# Altium PCB carteAction2026.PcbDoc
Units mil, origin at the board's own origin, x right, y up, seen from the top; angles counter-clockwise.
Board outline 6000 x 4000 mil, 2 copper layers (Top Layer, Bottom Layer); 54 components, 46 nets, 191 pads, 0 vias.
Unrouted connection lines stored in the file: 128.
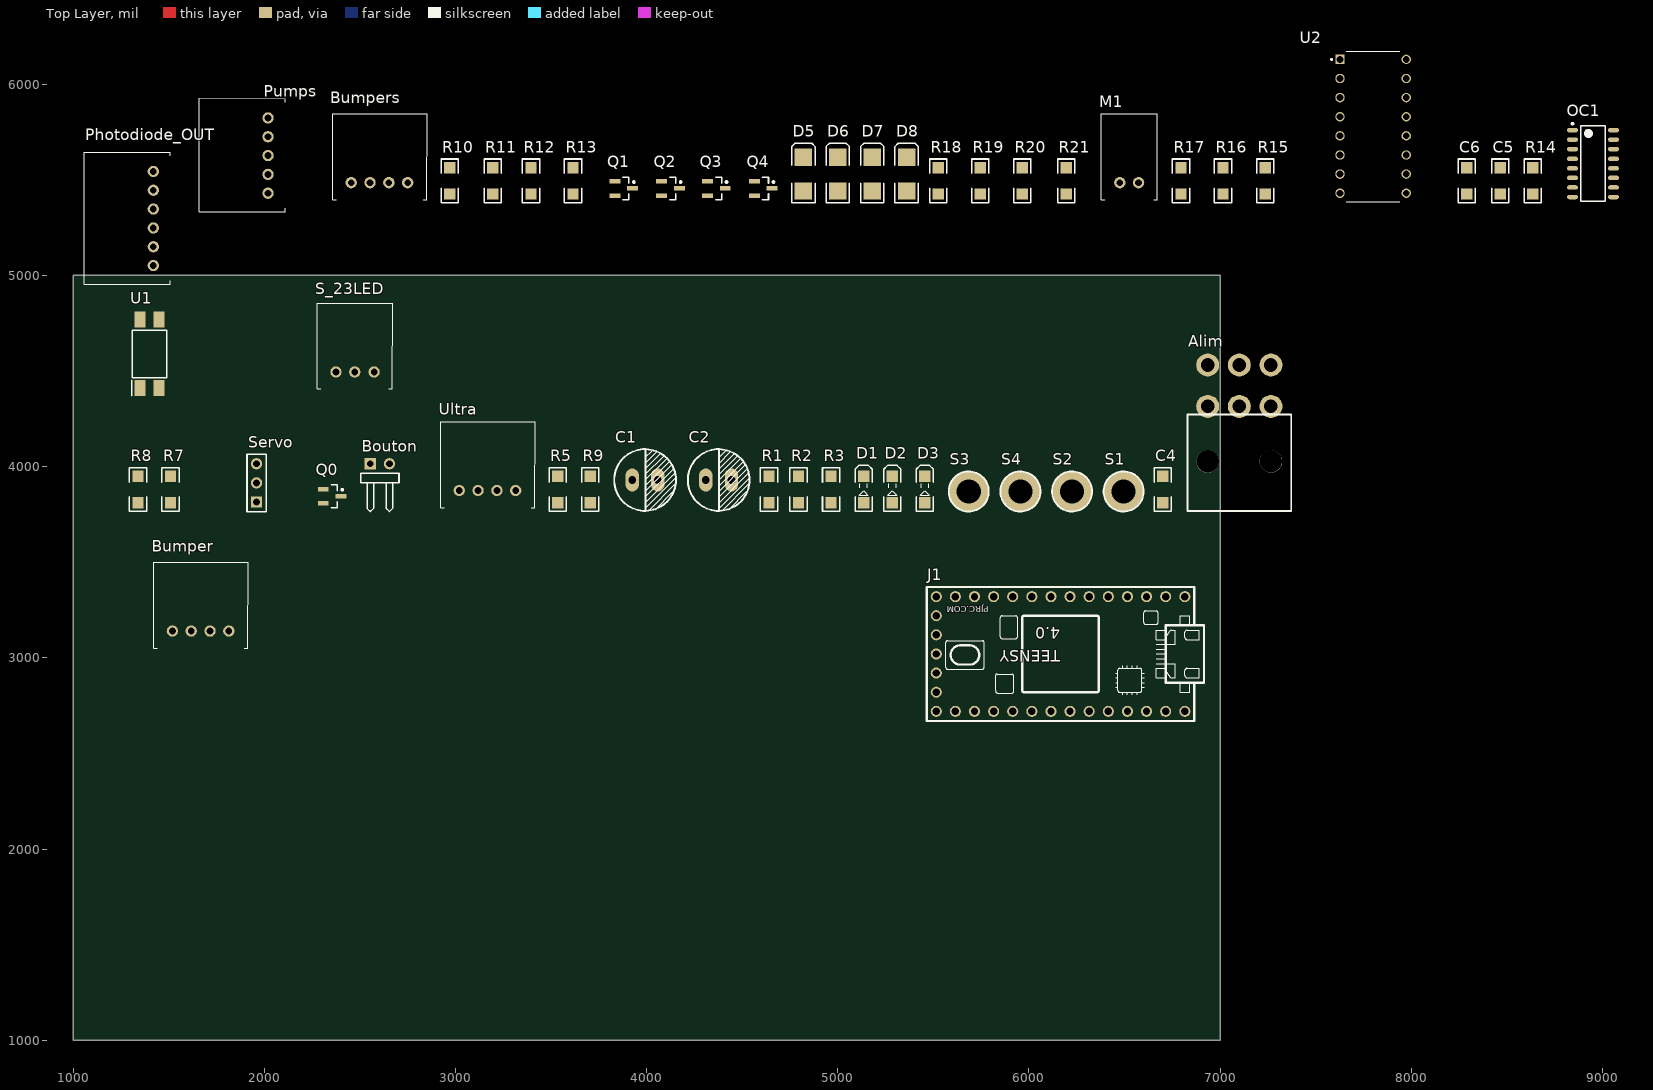
[diagram p0: Top Layer view]
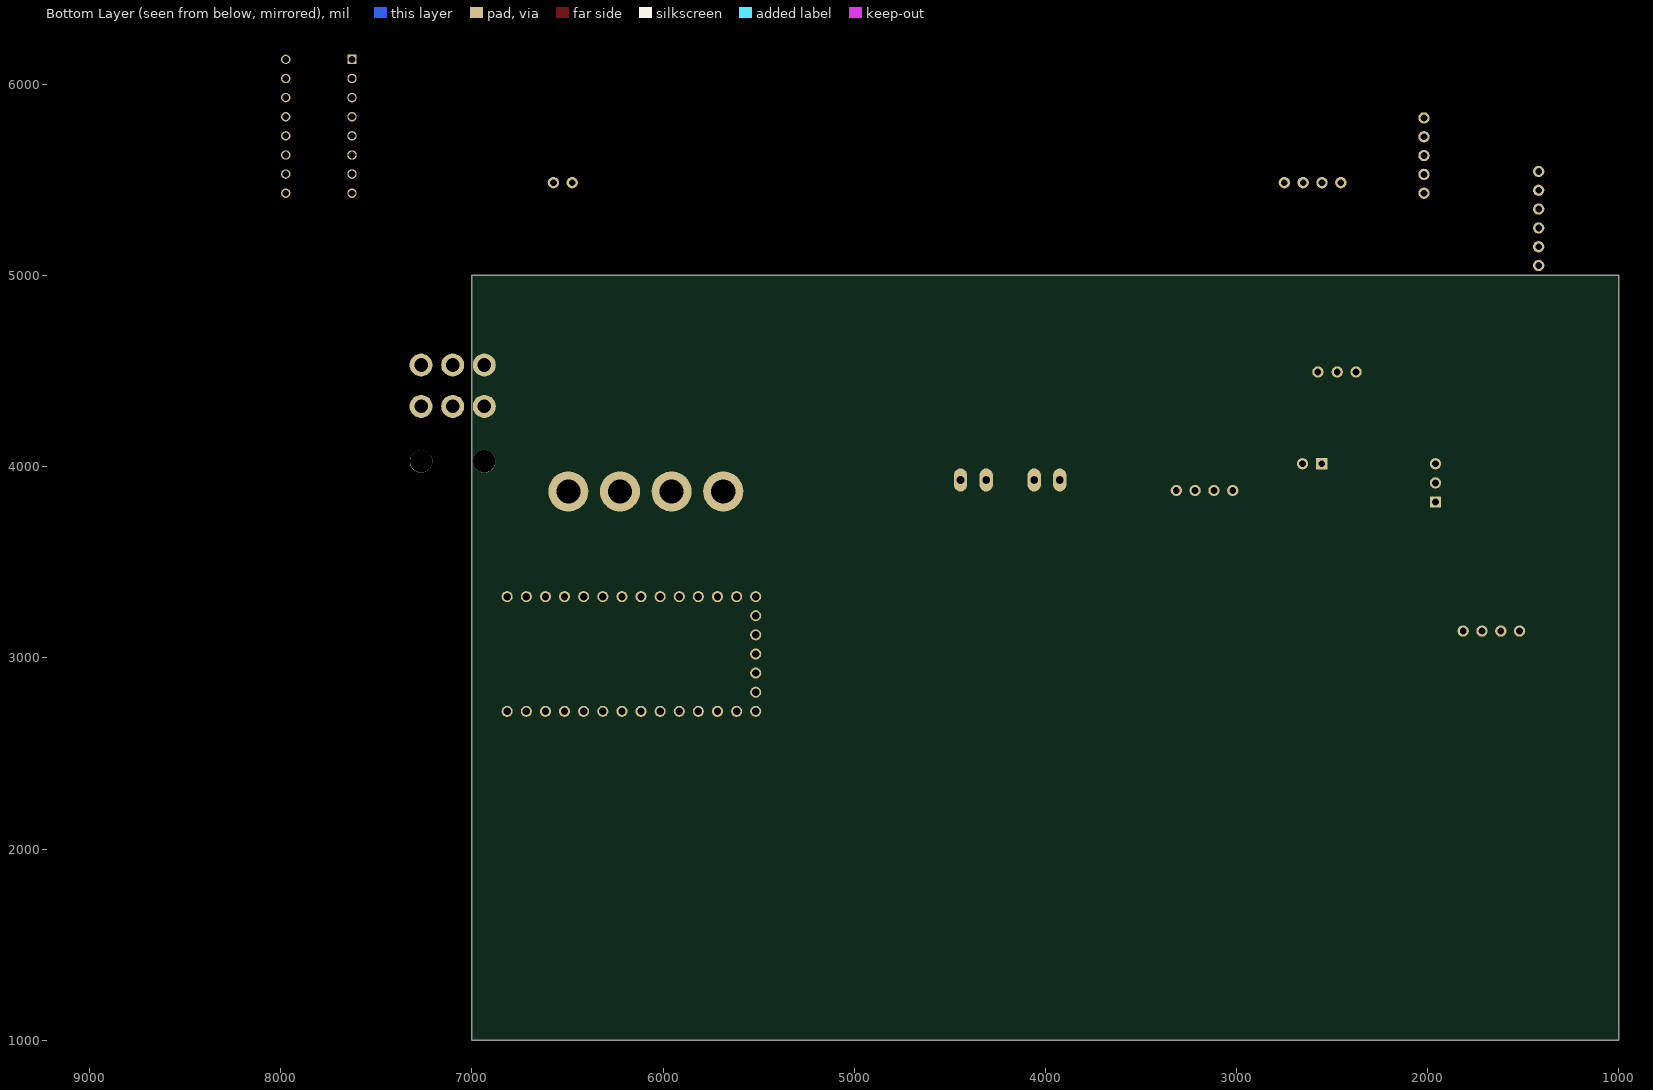
[diagram p1: Bottom Layer view, seen from below]

## Layer stack, top to bottom
Top Solder: solder mask 0.4, Solder Resist, Dk 3.5
Top Layer: signal copper 1.4
Dielectric 1: dielectric 12.6, FR-4, Dk 4.8
Bottom Layer: signal copper 1.4
Bottom Solder: solder mask 0.4, Solder Resist, Dk 3.5

## Board outline
1000,1000 7000,1000 7000,5000 1000,5000

## Design rules (kind name [scope] priority, off if disabled: settings)
Clearance [All] p1: gap=10 ignorepadtopadclearanceinfootprint=FALSE
PolygonConnect [All] p1: connectstyle=Relief reliefconductorwidth=10 reliefentries=4 polygonreliefangle="90 Angle" airgapwidth=10
RoutingVias [All] p1: holewidth=28 width=50 viastyle="Through Hole" minholewidth=28 minwidth=50 maxholewidth=28 maxwidth=50
SolderMaskExpansion [All] p1: expansion=4 istentingtop=FALSE
SupplyNets "Schematic Supply Nets_5" [InNet('5V_A')] p1: voltage=0.000
SupplyNets "Schematic Supply Nets_4" [InNet('GND_A')] p2: voltage=0.000
SupplyNets "Schematic Supply Nets_3" [InNet('12V_A')] p3: voltage=0.000
SupplyNets "Schematic Supply Nets_2" [InNet('5V_L')] p4: voltage=0.000
SupplyNets "Schematic Supply Nets_1" [InNet('GND_L')] p5: voltage=0.000
SupplyNets "Schematic Supply Nets" [InNet('3V_L')] p6: voltage=0.000
Width [All] p1: maxlimit=10 minlimit=10 preferedwidth=10
30 further rules are at their usual default settings.

## Classes and differential pairs
component class CarteAction_PontLevis2026: Bumper Bumpers C5 C6 D5 D6 D7 D8 M1 OC1 Photodiode_OUT Pumps Q1 Q2 Q3 Q4 R10 R11 R12 R13 R14 R15 R16 R17 R18 R19 R20 R21 S_23LED U2
component class CarteAction2026: Alim Bouton C1 C2 C4 D1 D2 D3 J1 Q0 R1 R2 R3 R5 R7 R8 R9 S1 S2 S3 S4 Servo U1 Ultra

## Components (designator, comment, footprint, x,y, rotation, side; value= is the part's Value field where it differs from the comment)
Alim "Header 3X2H" MOLEX_MINIFITJR_3X2 7100,4315 r0 top
Bouton "Header 2H" HDR1X2H 2555,4015 r0 top
Bumper "Header 4H" S4B-XH-A 1519.72,3140 r0 top
Bumpers "Header 4H" S4B-XH-A 2455,5485 r0 top
C1 "Cap2" Condensateur 3925,3930 r0 top value=100µF
C2 "Cap2" Condensateur 4310,3930 r0 top value=100µF
C4 "(Optional)" "Capacitor 1206" 6700,3880 r90 top value=10uF
C5 "" "Capacitor 1206" 8465,5495 r90 top value="100 nF"
C6 "" "Capacitor 1206" 8290,5495 r90 top value="1 uF"
D1 "5V_L" KP-3216SEC 5135,3880 r90 top
D2 "5V_A" KP-3216SEC 5285,3880 r90 top
D3 "12V_A" KP-3216SEC 5455,3880 r90 top
D5 "LGE SS12" SMB 4820,5530 r90 top
D6 "LGE SS12" SMB 5000,5530 r90 top
D7 "LGE SS12" SMB 5180,5530 r90 top
D8 "LGE SS12" SMB 5360,5530 r90 top
J1 "TEENSY_4.0" TEENSY_4.0 6165,3020 r180 top
M1 "M1" S2B-XH-A 6475,5485 r0 top
OC1 "PhotoCoupler" "16 pins SOIC, TI" 8950,5585 r0 top
Photodiode_OUT "Header 6H" S6B-XH-A 1420,5051.57 r90 top
Pumps "Header 5H" S5B-XH-A 2020,5430 r90 top
Q0 "MOSFET-N" SOT23_M 2355,3845 r0 top
Q1 "MOSFET-N" SOT23_M 3880,5455 r0 top
Q2 "MOSFET-N" SOT23_M 4125,5455 r0 top
Q3 "MOSFET-N" SOT23_M 4365,5455 r0 top
Q4 "MOSFET-N" SOT23_M 4610,5455 r0 top
R1 "Res2" "Resistor 1206" 4640,3880 r90 top value=300
R2 "Res2" "Resistor 1206" 4795,3880 r90 top value=300
R3 "Res2" "Resistor 1206" 4965,3880 r90 top value=1K3
R5 "Res2" "Resistor 1206" 3535,3880 r90 top value=10K
R7 "210" "Resistor 1206" 1510,3880 r90 top
R8 "Res2" "Resistor 1206" 1340,3880 r90 top value=10K
R9 "Res2" "Resistor 1206" 3705,3880 r90 top value=10K
R10 "Res2" "Resistor 1206" 2970,5495 r90 top value=10K
R11 "Res2" "Resistor 1206" 3195,5495 r90 top value=10K
R12 "Res2" "Resistor 1206" 3395,5495 r90 top value=10K
R13 "Res2" "Resistor 1206" 3615,5495 r90 top value=10K
R14 "Res2" "Resistor 1206" 8635,5495 r90 top value=210
R15 "Res2" "Resistor 1206" 7235,5495 r90 top value=210
R16 "Res2" "Resistor 1206" 7015,5495 r90 top value=210
R17 "Res2" "Resistor 1206" 6795,5495 r90 top value=210
R18 "Res2" "Resistor 1206" 5525,5495 r90 top value=10K
R19 "Res2" "Resistor 1206" 5745,5495 r90 top value=10K
R20 "Res2" "Resistor 1206" 5965,5495 r90 top value=10K
R21 "Res2" "Resistor 1206" 6195,5495 r90 top value=10K
S1 "Screw M3" "Screw M3" 6495,3870 r0 top
S2 "Screw M3" "Screw M3" 6225,3870 r0 top
S3 "Screw M3" "Screw M3" 5685,3870 r0 top
S4 "Screw M3" "Screw M3" 5955,3870 r0 top
S_23LED "Header 3" S3B-XH-A 2375,4495 r0 top
Servo "Header 3" HDR1X3 1960,3815 r90 top
U1 "FOD817S" SOP254P1016X385-4N 1400,4590 r90 top
U2 "L293D" DIP880W50P254L2000H510Q16 7800,5780 r0 top
Ultra "Header 4H" S4B-XH-A 3020,3875 r0 top

## Footprints (in the part's own frame and the unit in brackets; to place one, negate y for a bottom-side part, rotate by r counter-clockwise, add the part's x,y. Pads: shape width x height; smd on the part's side, far side on the other; paste and mask are expansions set on the pad)
"16 pins SOIC, TI" [mm] "SOIC, 16-Leads, Body 9,90x3,90mm, Pitch 1,27mm, IPC Medium Density"
  oval 1.45x0.6 smd: 1(-2.725,4.445) 2(-2.725,3.175) 3(-2.725,1.905) 4(-2.725,0.635) 5(-2.725,-0.635) 6(-2.725,-1.905) 7(-2.725,-3.175) 8(-2.725,-4.445) 9(2.725,-4.445) 10(2.725,-3.175) 11(2.725,-1.905) 12(2.725,-0.635) 13(2.725,0.635) 14(2.725,1.905) 15(2.725,3.175) 16(2.725,4.445)
  silkscreen extent -2.85,-5 1.6,5.42, body extent -3,-5 3,5, height 1.75
"Capacitor 1206" [mm]
  rect 1.5x1.5 smd: 1(-1.75,0) 2(1.75,0)
  silkscreen extent -2.89,-1.14 2.89,1.14, body extent -1.98,-0.99 1.98,0.96, height 1.3
Condensateur [mil]
  oval 70x120 hole 40: 1(0,0) 2(133.86,0)
  silkscreen extent -94,-161 228,161, body extent -93,-160 227,160, height 500
DIP880W50P254L2000H510Q16 [mm]
  rect 1.25x1.25 / inner round 1.25 / far side rect 1.25x1.25 hole 0.9: 1(-4.4,8.89)
  round 1.25 hole 0.9: 2(-4.4,6.35) 3(-4.4,3.81) 4(-4.4,1.27) 5(-4.4,-1.27) 6(-4.4,-3.81) 7(-4.4,-6.35) 8(-4.4,-8.89) 9(4.4,-8.89) 10(4.4,-6.35) 11(4.4,-3.81) 12(4.4,-1.27) 13(4.4,1.27) 14(4.4,3.81) 15(4.4,6.35) 16(4.4,8.89)
  silkscreen extent -5.62,-10 3.55,10, body extent -10,-4.62 10,4.62, height 5.1
HDR1X2H [mm] "Connector; Header; 2 Position; Right Angle"
  rect 1.5x1.5 hole 0.9: 1(0,0)
  round 1.5 hole 0.9: 2(2.54,0)
  silkscreen extent -1.27,-6.35 3.81,-1.27
HDR1X3 [mm] "Connector; Header; 3 Position"
  rect 1.5x1.5 hole 0.9: 1(0,0)
  round 1.5 hole 0.9: 2(2.54,0) 3(5.08,0)
  silkscreen extent -1.27,-1.27 6.35,1.27
KP-3216SEC [mm]
  rect 1.5x1.5 smd: 1(-1.75,0) 2(1.75,0)
  silkscreen extent -2.89,-1.14 3.2,1.14, body extent -1.7,-0.79 1.5,0.81, height 1.1
MOLEX_MINIFITJR_3X2 [mm] "MOLEX_MINIFITJR_3X2, 39-30-1060"
  round 3.048 hole 1.8: 1(-4.2,5.5) 2(-4.2,0) 3(0,5.5) 4(0,0) 5(4.2,5.5) 6(4.2,0)
  round 3 hole 3 unplated: 10(-4.2,-7.3) 11(4.2,-7.3)
  silkscreen extent -6.9,-13.9 6.9,-1.1, body extent -6.9,-13.9 7.3,6.04, height 11.41
"Resistor 1206" [mm]
  rect 1.5x1.5 smd: 1(-1.75,0) 2(1.75,0)
  silkscreen extent -2.89,-1.14 2.89,1.14, body extent -1.98,-0.95 1.98,0.93, height 0.55
S2B-XH-A [mm]
  round 1.5 hole 0.9: 1(0,0) 2(2.5,0)
  silkscreen extent -2.45,-2.26 5,9.14, body extent -2.41,-2.32 4.99,9.18, height 6.15
S3B-XH-A [mm]
  round 1.5 hole 0.9: 1(0,0) 2(2.5,0) 3(5.08,0)
  silkscreen extent -2.45,-2.26 7.54,9.14, body extent -2.44,-2.27 7.46,9.23, height 6.15
S4B-XH-A [mm]
  round 1.5 hole 0.9: 1(0,0) 2(2.5,0) 3(5,0) 4(7.5,0)
  silkscreen extent -2.45,-2.26 10.08,9.14, body extent -2.44,-2.32 9.96,9.18, height 6.15
S5B-XH-A [mm]
  round 1.5 hole 0.9: 1(0,0) 2(2.5,0) 3(5,0) 4(7.5,0) 5(10,0)
  silkscreen extent -2.45,-2.26 12.58,9.14, body extent -2.45,-2.3 12.45,9.2, height 6.15
S6B-XH-A [mm]
  round 1.5 hole 0.9: 1(0,0) 2(2.5,0) 3(5,0) 4(7.5,0) 5(10,0) 6(12.5,0)
  silkscreen extent -2.45,-2.26 15.08,9.14, body extent -2.45,-2.3 14.95,9.2, height 6.15
"Screw M3" [mm] "M3 iso Screw"
  round 5.32 hole 3.2 unplated: 0(0,0)
  silkscreen extent -2.66,-2.66 2.66,2.66
SMB [mm] "DO-214-AA/SMB; 2 C-Bend Leads; Body 5.3 x 3.6 mm, inc. leads (LxW)"
  rect 2.3x2.3 smd: 1(-2.25,0) 2(2.25,0)
  silkscreen extent -3.8,-1.55 4.1,1.55
SOP254P1016X385-4N [mm]
  rect 2.1x1.5 smd: 1(-4.55,1.27) 2(-4.55,-1.27) 3(4.55,-1.27) 4(4.55,1.27)
  silkscreen extent -5.6,-2.3 3.15,2.37, body extent -5.08,-2.3 5.08,2.3, height 3.85
SOT23_M [mm] "SOT23, 3-Leads, Body 2.9x1.3mm, Pitch 0.95mm, Lead Span 2.3mm - Reverse Pinning, IPC Low Density"
  rect 1.45x0.6 smd: 1(1.175,0) 2(-1.175,-0.95) 3(-1.175,0.95)
  silkscreen extent -0.1,-1.5 1.48,1.5, body extent -0.7,-1.5 0.7,1.5, height 1.1
TEENSY_4.0 [mil]
  round 58 hole 38: 0/RX(-550,-300) 1/TX(-450,-300) 2(-350,-300) 3/CANTX(-250,-300) 3V3_LN(650,-100) 3V3_LO(-450,300) 4/CANRX(-150,-300) 5(-50,-300) 6(50,-300) 7(150,-300) 8(250,-300) 9/CS(350,-300) 10/CS(450,-300) 11/MOSI(550,-300) 12/MISO(650,-300) 13/SCK(650,300) 14/A0(550,300) 15/A1(450,300) 16/A2(350,300) 17/A3(250,300) 18/A4/SDA(150,300) 19/A5/SCL(50,300) 20/A6(-50,300) 21/A7(-150,300) 22/A8(-250,300) 23/A9(-350,300) GND(-650,-300) GND2(-550,300) GND3(650,0) ON/OFF(650,200) PROG(650,100) VBAT\(650,-200) VIN(-650,300)
  silkscreen extent -750,-350 700,350, body extent -728,-350 700,350, height 172

## Part data
Alim: "Header, 3-Pin, Dual row, Right Angle", LatestRevisionDate=17-Jul-2002, LatestRevisionNote="Re-released for DXP Platform.", Publisher="Altium Limited"
Bouton: "Header, 2-Pin, Right Angle", LatestRevisionDate=17-Jul-2002, LatestRevisionNote="Re-released for DXP Platform.", Publisher="Altium Limited"
Bumper Bumpers Ultra: "Header, 4-Pin, Right Angle", LatestRevisionDate=17-Jul-2002, LatestRevisionNote="Re-released for DXP Platform.", Publisher="Altium Limited"
C1 C2: "Capacitor", PackageDescription="Capacitor; 2 Leads", PackageReference=CAPR5-4X5, Published=23-Sep-2002, Publisher="Altium Limited"
C4 C5 C6: library part Cap, "Capacitor", LatestRevisionDate=17-Jul-2002, LatestRevisionNote="Re-released for DXP Platform.", PackageDescription="Radial Cap, Thru-Hole; 2 Leads; 0.3 in Pin Spacing", PackageReference=RAD-0.3, Published=8-Jun-2000, Publisher="Altium Limited"
D1 D2 D3: library part LED2, "Typical RED, GREEN, YELLOW, AMBER GaAs LED", LatestRevisionDate=17-Jul-2002, LatestRevisionNote="Re-released for DXP Platform.", PackageDescription="SM LED; 2 Flat Leads", PackageReference=3.2X1.6X1.1, PackageVersion=Feb-2002, Published=8-Jun-2000, Publisher="Altium Limited"
D5 D6 D7 D8: library part Diode, "Default Diode", Code_JEDEC=DO-214-AB, LatestRevisionDate=17-Jul-2002, LatestRevisionNote="Re-released for DXP Platform.", PackageDescription="DO-214-AB/SMC; 2 C-Bend Leads; Body 7.9 x 5.9 mm, inc. leads (LxW)", PackageReference=SMC, PackageVersion=Sep-1996, Published=8-Jun-2000, Publisher="Altium Limited"
J1: Package=None, Check_prices=https://www.snapeda.com/parts/Teensy%204.0/PJRC/view-part/?ref=eda, MF=PJRC, MP="Teensy 4.0", SnapEDA_Link=https://www.snapeda.com/parts/Teensy%204.0/PJRC/view-part/?ref=snap
M1: library part "Header 2H", "Header, 2-Pin, Right Angle", LatestRevisionDate=17-Jul-2002, LatestRevisionNote="Re-released for DXP Platform.", Publisher="Altium Limited"
OC1: library part LTV-247, "Integrated Circuit", Manufacturer_Name=Lite-On, Mouser Part Number=859-LTV-247, Arrow Part Number=LTV-247, Arrow Price/Stock=https://www.arrow.com/en/products/ltv-247/lite-on-technology, Datasheet Link=http://optoelectronics.liteon.com/upload/download/DS70-2009-0014/LTV-2X7%20sereis%20Mar17.PDF, Manufacturer_Part_Number=LTV-247, Mouser Price/Stock=https://www.mouser.co.uk/ProductDetail/Lite-On/LTV-247/?qs=9ayhpukWNmvWpoxQBzWkFA%3D%3D
Photodiode_OUT: "Header, 6-Pin, Right Angle", LatestRevisionDate=17-Jul-2002, LatestRevisionNote="Re-released for DXP Platform.", Publisher="Altium Limited"
Pumps: "Header, 5-Pin, Right Angle", LatestRevisionDate=17-Jul-2002, LatestRevisionNote="Re-released for DXP Platform.", Publisher="Altium Limited"
Q0 Q1 Q2 Q3 Q4: "N-Channel MOSFET", LatestRevisionDate=17-Jul-2002, LatestRevisionNote="Re-released for DXP Platform.", PackageDescription="TO, Flat Index; 3 In-Line, Axial Leads; Body Dia. 4.6mm; Lead Dia. 0.5 mm (max)", PackageReference=E3, PackageVersion=1995/1996, Published=8-Jun-2000, Publisher="Altium Limited"
R1 R2 R3 R5 R8 R9 R10 R11 R12 R13 R14 R15 R16 R17 R18 R19 R20 R21: "Resistor", LatestRevisionDate=17-Jul-2002, LatestRevisionNote="Re-released for DXP Platform.", PackageDescription="Axial Device, Thru-Hole; 2 Leads; 0.4 in Pin Spacing", PackageReference=AXIAL-0.4, Published=8-Jun-2000, Publisher="Altium Limited"
R7: library part Res2, "Resistor", LatestRevisionDate=17-Jul-2002, LatestRevisionNote="Re-released for DXP Platform.", PackageDescription="Axial Device, Thru-Hole; 2 Leads; 0.4 in Pin Spacing", PackageReference=AXIAL-0.4, Published=8-Jun-2000, Publisher="Altium Limited"
S_23LED Servo: "Header, 3-Pin", LatestRevisionDate=17-Jul-2002, LatestRevisionNote="Re-released for DXP Platform.", Publisher="Altium Limited"
U1: library part Optoisolator1, "4-Pin Phototransistor Optocoupler", DatasheetVersion=Nov-2003, LatestRevisionDate=04-Mar-2005, LatestRevisionNote="Sch pins 3 & 4 Swapped.", PackageReference=DIP-4, Published=24-Mar-1999, Publisher="Altium Limited"
U2: "Bipolar Motor Driver - Parallel 16-PowerDIP", Package="DIP-16 STMicroelectronics", Availability="In Stock", Check_prices=https://www.snapeda.com/parts/L293D/STMicroelectronics/view-part/?ref=eda, MF=STMicroelectronics, MP=L293D, Price=None, Purchase-URL=https://pricing.snapeda.com/search/part/L293D/?ref=eda, SnapEDA_Link=https://www.snapeda.com/parts/L293D/STMicroelectronics/view-part/?ref=snap

## Nets (pads, with @x,y where several pads share a name; then routed paths per layer and width w, separated by ;. In a path a pad name is that pad's centre, name@x,y a point inside that pad or via, vN(x,y) a via of type N, cw(c..) or ccw(c..) an arc to the next point about the centre after c; other vN are vias at no path point)
3V_L: Bouton.2 Bumper.1 Bumpers.1 J1.3V3_LO Q0.3
5V_A: Alim.6 C1.1 C5.1 D2.1 Photodiode_OUT.1 R5.1 Servo.1 U1.4 U2.16 Ultra.1
5V_L: Alim.5 C4.2 D1.1 J1.VIN
12V_A: Alim.4 C2.1 C6.1 D3.1 D5.2 D6.2 D7.2 D8.2 OC1.10 OC1.12 OC1.14 OC1.16 Pumps.1 U2.8
enable: J1.9/CS U2.1
GND_A: Alim.2 C1.2 C2.2 C5.2 C6.2 Photodiode_OUT.6 Q1.2 Q2.2 Q3.2 Q4.2 R2.2 R3.2 R8.1 R9.1 R10.2 R11.2 R12.2 R13.2 R18.1 R19.1 R20.1 R21.1 Servo.3 U2.4 U2.5 U2.10 U2.12 U2.13 U2.15
GND_L: Alim.1 Bumper.4 Bumpers.4 C4.1 J1.GND J1.GND2 J1.GND3 OC1.2 OC1.4 OC1.6 OC1.8 R1.1 U1.2 U2.9 Ultra.4
NetD1_2: D1.2 R1.2
NetD2_2: D2.2 R2.1
NetD3_2: D3.2 R3.1
NetM1_1: M1.1 U2.6
NetM1_2: M1.2 U2.3
NetOC1_1: OC1.1 R14.1
NetOC1_3: OC1.3 R15.1
NetOC1_5: OC1.5 R16.1
NetOC1_7: OC1.7 R17.1
NetR7_2: R7.2 U1.1
O_Pump_1: OC1.15 Q1.3 R10.1 R21.2
O_Pump_2: OC1.13 Q2.3 R11.1 R20.2
O_Pump_3: OC1.11 Q3.3 R12.1 R19.2
O_Pump_4: OC1.9 Q4.3 R13.1 R18.2
O_PWM: R8.2 Servo.2 U1.3
Pump_1: D5.1 Pumps.2 Q1.1
Pump_2: D6.1 Pumps.3 Q2.1
Pump_3: D7.1 Pumps.4 Q3.1
Pump_4: D8.1 Pumps.5 Q4.1
T_Bump_1: Bumper.2 Bumpers.2 J1.10/CS
T_Bump_2: Bumper.3 Bumpers.3 J1.11/MOSI
T_Homolog: Bouton.1 J1.12/MISO R9.2
T_LED: J1.8 S_23LED.1
T_M_Sens1: J1.14/A0 U2.2
T_M_Sens2: J1.13/SCK U2.7
T_OUT_1: J1.23/A9 Photodiode_OUT.2
T_OUT_2: J1.22/A8 Photodiode_OUT.3
T_OUT_3: J1.21/A7 Photodiode_OUT.4
T_OUT_4: J1.20/A6 Photodiode_OUT.5
T_Pump_1: J1.0/RX R14.2
T_Pump_2: J1.1/TX R15.2
T_Pump_3: J1.2 R16.2
T_Pump_4: J1.3/CANTX R17.2
T_PWM: J1.15/A1 R7.1
T_S2: J1.6 S_23LED.3
T_S3: J1.7 S_23LED.2
T_Ultra_Echo: J1.5 Ultra.3
T_Ultra_Trig: J1.4/CANRX Q0.2
Ultra_Trig: Q0.1 R5.2 Ultra.2
pads on no net: Alim.3 Alim.10 Alim.11 J1.3V3_LN J1.16/A2 J1.17/A3 J1.18/A4/SDA J1.19/A5/SCL J1.ON/OFF J1.PROG J1.VBAT\ S1.0 S2.0 S3.0 S4.0 U2.11 U2.14

## Text inside footprints (layer, text, board x,y; h text height)
J1: Top Overlay "TEENSY" at 6163.75,3040 h60 r180; Top Overlay "4.0" at 6163.75,3160 h60 r180; Top Overlay "PJRC.COM" at 5790,3270 h32 r180